# Altium PCB TransformerCard.PcbDoc
Units mil, origin at the board's own origin, x right, y up, seen from the top; angles counter-clockwise.
Board outline 7010 x 2725 mil, 2 copper layers (Top Layer, Bottom Layer); 1 components, 0 nets, 80 pads, 0 vias.
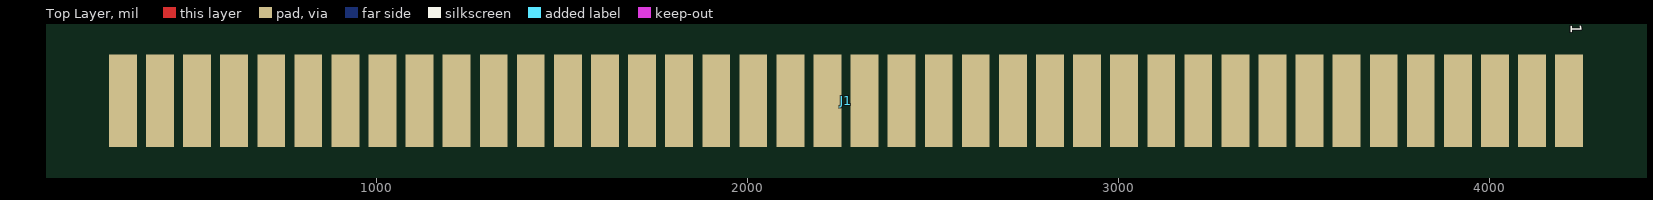
[diagram p0: Top Layer view]
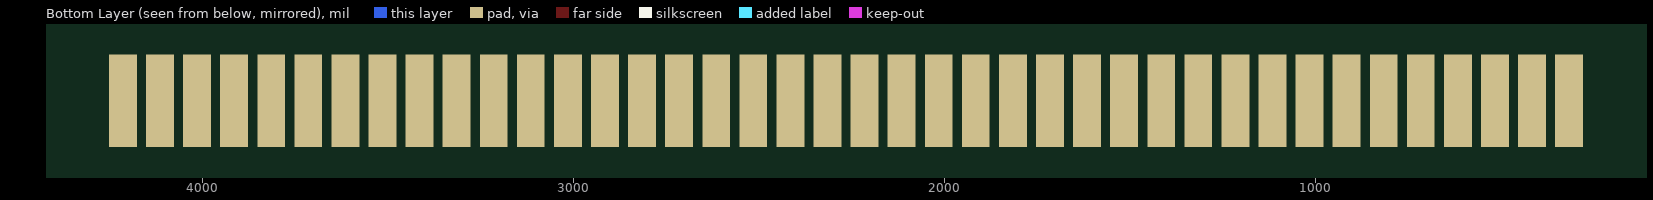
[diagram p1: Bottom Layer view, seen from below]

## Layer stack, top to bottom
Top Layer: signal copper 1.4
Dielectric: dielectric 12.6, FR-4, Dk 4.8
Bottom Layer: signal copper 1.4

## Board outline
-585,450 -585,-2275 6425,-2275 6425,440 6415,450 -565,450

## Design rules (kind name [scope] priority, off if disabled: settings)
Clearance [All] p1: gap=10
PolygonConnect [All] p1: connectstyle=Relief reliefconductorwidth=10 reliefentries=4 polygonreliefangle="90 Angle"
RoomDefinition TransformerCard [InComponentClass('TransformerCard')] p1: confinementstyle=ConfineIn formatcopy=TRUE lockcomponents=FALSE outline -1635,-3100 6740,-3100 6740,1785 -1635,1785
RoutingVias [All] p1: holewidth=28 width=50 viastyle="Through Hole" minholewidth=28 minwidth=50 maxholewidth=28 maxwidth=50
SilkscreenOverComponentPads [All] p1: minsilkscreentomaskgap=10
SolderMaskExpansion [All] p1: expansion=4
Width [All] p1: maxlimit=10 minlimit=10 preferedwidth=10
27 further rules are at their usual default settings.

## Components (designator, comment, footprint, x,y, rotation, side; value= is the part's Value field where it differs from the comment)
J1 "HarnessConnector" HarnessConnector 515,-1620 r180 top

## Footprints (in the part's own frame and the unit in brackets; to place one, negate y for a bottom-side part, rotate by r counter-clockwise, add the part's x,y. Pads: shape width x height; smd on the part's side, far side on the other; paste and mask are expansions set on the pad)
HarnessConnector [mil]
  rect 75x250 smd: 1(-3700,0) 2(-3600,0) 3(-3500,0) 4(-3400,0) 5(-3300,0) 6(-3200,0) 7(-3100,0) 8(-3000,0) 9(-2900,0) 10(-2800,0) 11(-2700,0) 12(-2600,0) 13(-2500,0) 14(-2400,0) 15(-2300,0) 16(-2200,0) 17(-2100,0) 18(-2000,0) 19(-1900,0) 20(-1800,0) 21(-1700,0) 22(-1600,0) 23(-1500,0) 24(-1400,0) 25(-1300,0) 26(-1200,0) 27(-1100,0) 28(-1000,0) 29(-900,0) 30(-800,0) 31(-700,0) 32(-600,0) 33(-500,0) 34(-400,0) 35(-300,0) 36(-200,0) 37(-100,0) 38(0,0) 39(100,0) 40(200,0)
  rect 75x250 smd far side: 41(-3700,0) 42(-3600,0) 43(-3500,0) 44(-3400,0) 45(-3300,0) 46(-3200,0) 47(-3100,0) 48(-3000,0) 49(-2900,0) 50(-2800,0) 51(-2700,0) 52(-2600,0) 53(-2500,0) 54(-2400,0) 55(-2300,0) 56(-2200,0) 57(-2100,0) 58(-2000,0) 59(-1900,0) 60(-1800,0) 61(-1700,0) 62(-1600,0) 63(-1500,0) 64(-1400,0) 65(-1300,0) 66(-1200,0) 67(-1100,0) 68(-1000,0) 69(-900,0) 70(-800,0) 71(-700,0) 72(-600,0) 73(-500,0) 74(-400,0) 75(-300,0) 76(-200,0) 77(-100,0) 78(0,0) 79(100,0) 80(200,0)

## Nets (pads, with @x,y where several pads share a name; then routed paths per layer and width w, separated by ;. In a path a pad name is that pad's centre, name@x,y a point inside that pad or via, vN(x,y) a via of type N, cw(c..) or ccw(c..) an arc to the next point about the centre after c; other vN are vias at no path point)
pads on no net: J1.1 J1.2 J1.3 J1.4 J1.5 J1.6 J1.7 J1.8 J1.9 J1.10 J1.11 J1.12 J1.13 J1.14 J1.15 J1.16 J1.17 J1.18 J1.19 J1.20 J1.21 J1.22 J1.23 J1.24 J1.25 J1.26 J1.27 J1.28 J1.29 J1.30 J1.31 J1.32 J1.33 J1.34 J1.35 J1.36 J1.37 J1.38 J1.39 J1.40 J1.41 J1.42 J1.43 J1.44 J1.45 J1.46 J1.47 J1.48 J1.49 J1.50 J1.51 J1.52 J1.53 J1.54 J1.55 J1.56 J1.57 J1.58 J1.59 J1.60 J1.61 J1.62 J1.63 J1.64 J1.65 J1.66 J1.67 J1.68 J1.69 J1.70 J1.71 J1.72 J1.73 J1.74 J1.75 J1.76 J1.77 J1.78 J1.79 J1.80

## Polygon pours and split planes (outlines as drawn)
no net on Mechanical 1 "TopOverlay-No Net" (none): 0,-1400 0,0 6000,0 6000,-1400 4300,-1400 4300,-1750 230,-1750 230,-1400 0,-1400